# EAGLE board PCB-BI8-SE-C30RGB (EAGLE 6.4)
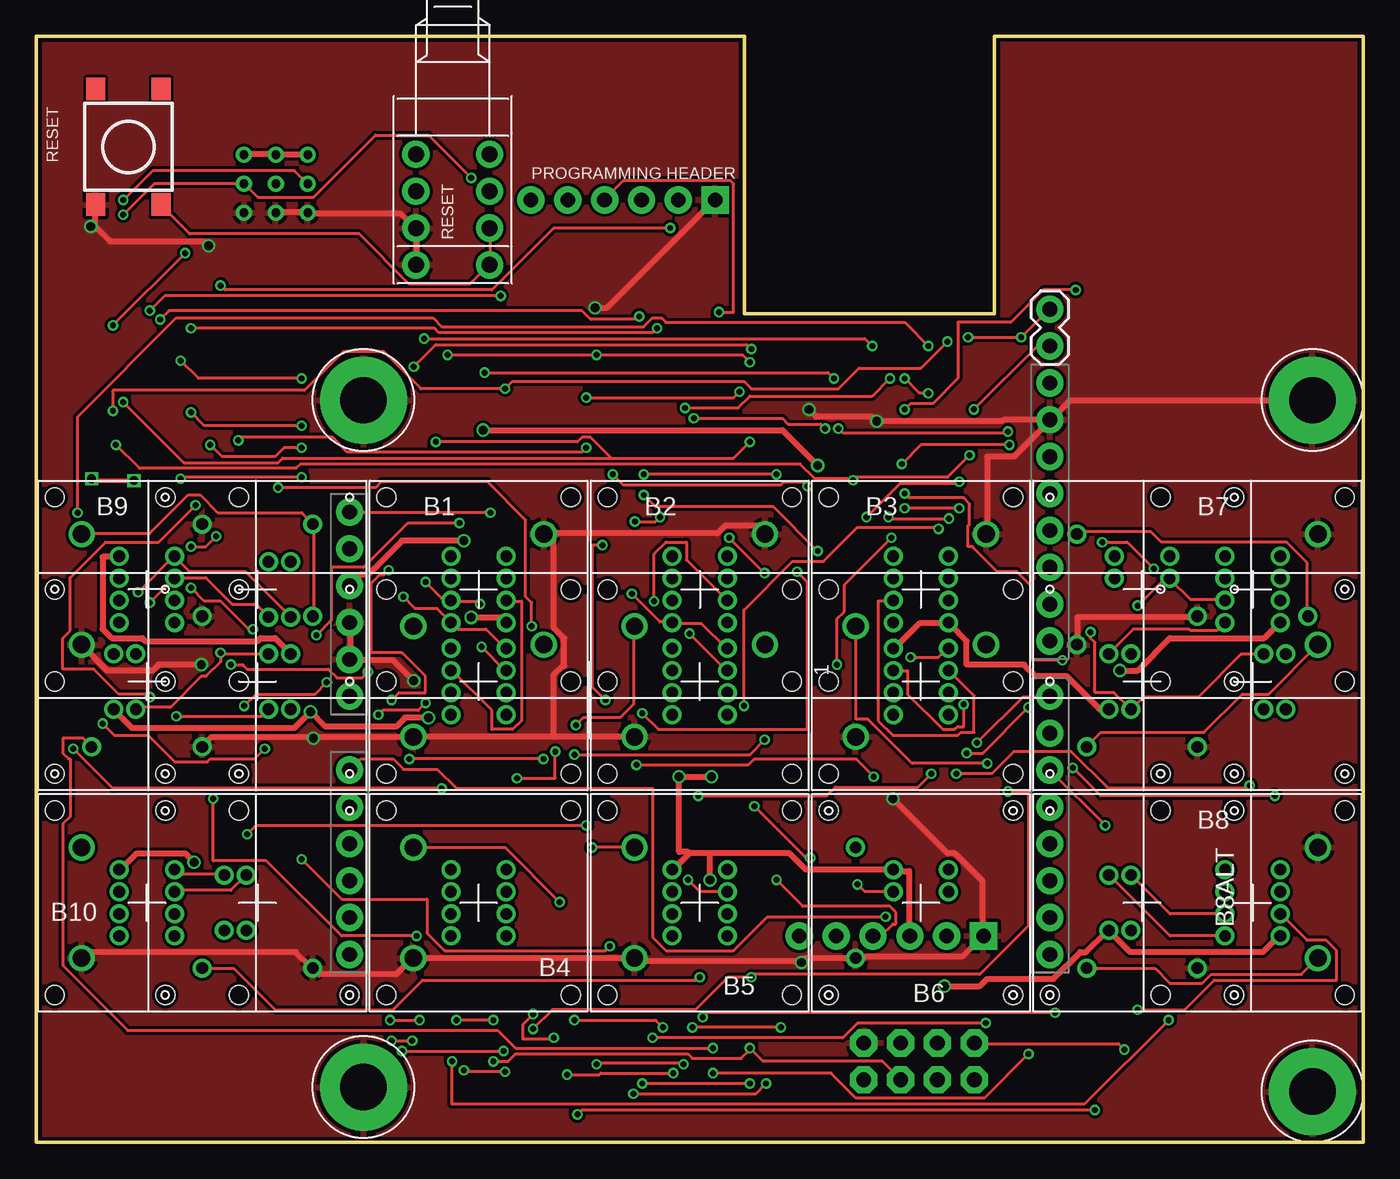
[diagram p0: board, top side]
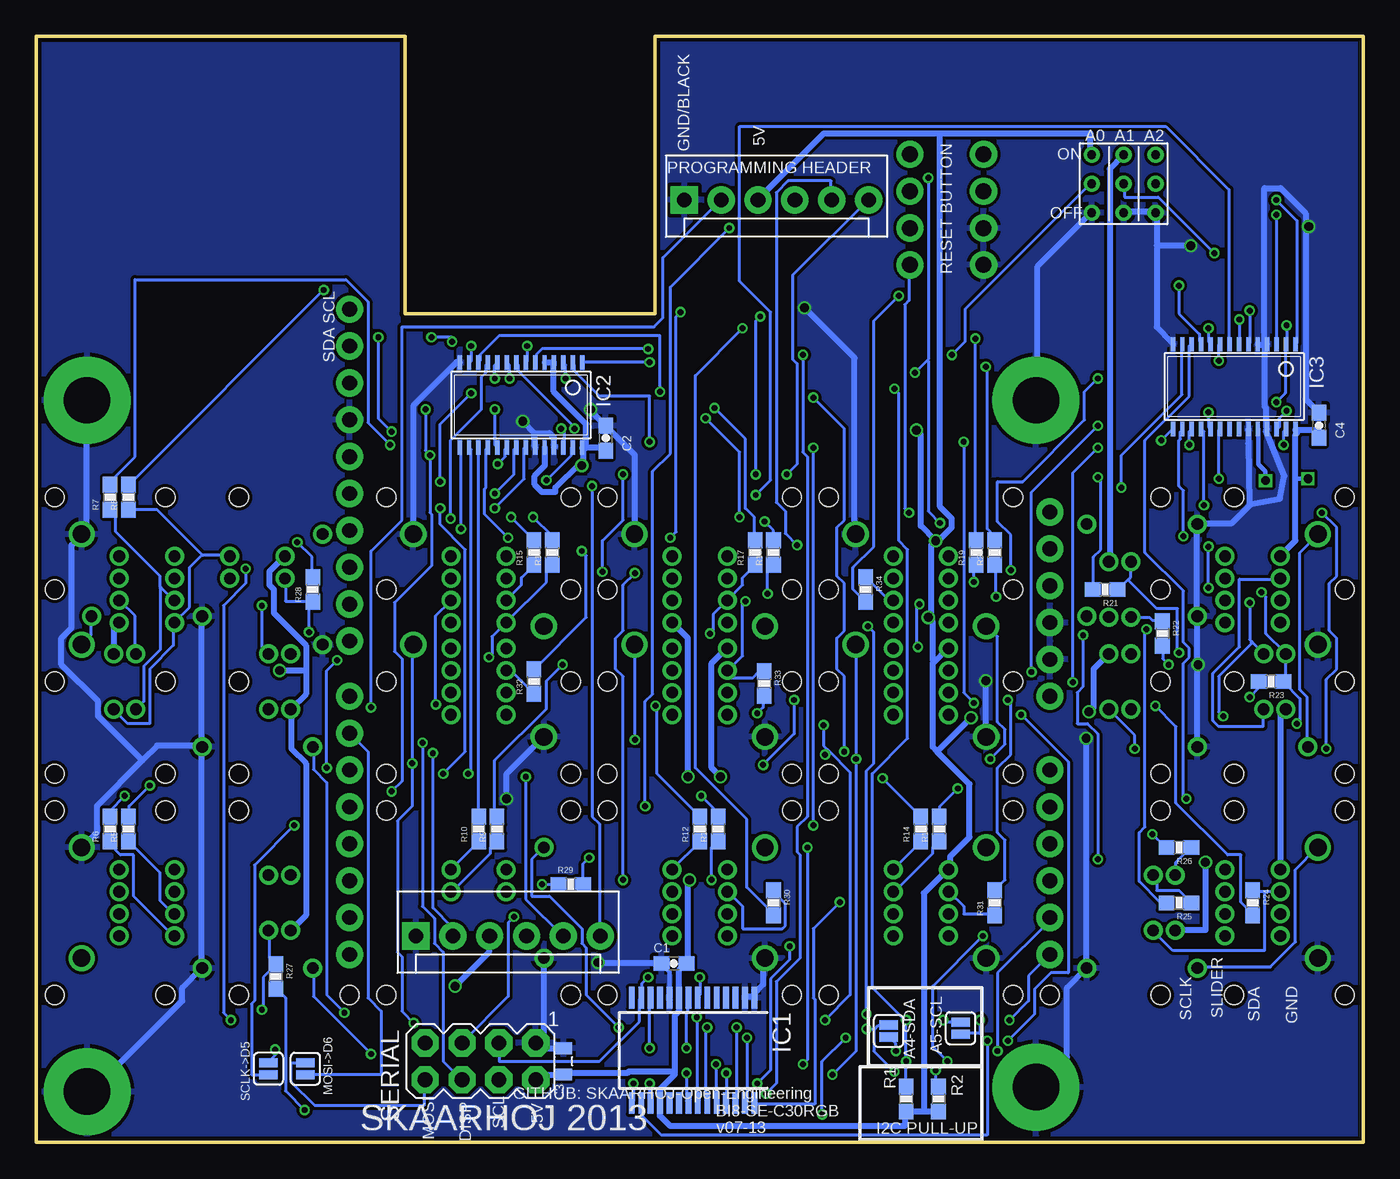
[diagram p1: board, bottom side, seen from below]

Size 91.44 x 76.2 mm. Coordinates in mm from the lower left corner, seen from the top.
Outline: 66.04,76.2 66.04,57.1 48.82,57.1 48.82,76.2 0,76.2 0,0 91.44,0 91.44,76.2 66.04,76.2
Copper layers (1*16): Top 0.035mm / dielectric 1.5mm / Bottom 0.035mm
Design rules "Fusion_eagle_rule_v1.1": minimum track width 6mil, minimum drill 12mil, track to track 6mil, track to pad 6mil, pad to pad 6mil, via to via 6mil, smd to smd 0mil, copper to edge 10mil, drill to drill 10mil, minimum pad ring 10mil, minimum via ring 6mil, stop-mask expansion 2mil, vias tented up to drill 100mil, thermal gap 10mil
Net classes: 0 default: width 0.203 mm, drill 0.406 mm, clearance 0.203 mm; 1 Power: width 0.406 mm, drill 0.61 mm, clearance 0.203 mm
Holes 1.3 mm at 90.17,38.1 82.55,44.45 82.55,31.75 90.17,25.4 82.55,25.4 77.47,25.4 82.55,22.86 82.55,10.16 69.85,10.16 67.31,10.16 67.31,22.86 54.61,10.16 54.61,22.86 8.89,44.45 1.27,38.1 1.27,25.4 8.89,25.4 13.97,25.4 8.89,22.86 8.89,31.75 13.97,38.1 21.59,10.16 8.89,10.16
tRestrict: area 48.6,56.6 to 66.3,76.2
bRestrict: area 48.6,56.6 to 66.3,76.2

## Footprints (pad centres in the part's own frame; a part is rotated, then mirrored left to right if it is on the bottom)
NKK-KP01 = drill 0.8: B(-) 1.905,-0.762; COM(+) 1.905,-2.286; G(-) -1.905,-2.286; P$3 1.905,0.762; P$4 1.905,2.286; P$7 -1.905,0.762; P$8 -1.905,2.286; R(-) -1.905,-0.762 | drill 1.2: P$1 4.496,3.81; P$1A 4.496,-3.81 | hole 1.3: -6.35,6.35; 6.35,6.35; 6.35,-6.35; -6.35,-6.35
NKK-KP01_LESSHOLES = drill 0.8: B(-) 1.905,-0.762; COM(+) 1.905,-2.286; G(-) -1.905,-2.286; P$1 4.496,3.81; P$1A 4.496,-3.81; R(-) -1.905,-0.762
0603-CAP = smd 1.1 x 1: 1 -0.85,0; 2 0.85,0
0805 = smd 0.8 x 1.2: 1 -0.9,0; 2 0.9,0
SSOP28 = smd 0.4 x 1.5: 1 -4.225,-3.625; 2 -3.575,-3.625; 3 -2.925,-3.625; 4 -2.275,-3.625; 5 -1.625,-3.625; 6 -0.975,-3.625; 7 -0.325,-3.625; 8 0.325,-3.625; 9 0.975,-3.625; 10 1.625,-3.625; 11 2.275,-3.625; 12 2.925,-3.625; 13 3.575,-3.625; 14 4.225,-3.625; 15 4.225,3.625; 16 3.575,3.625; 17 2.925,3.625; 18 2.275,3.625; 19 1.625,3.625; 20 0.975,3.625; 21 0.325,3.625; 22 -0.325,3.625; 23 -0.975,3.625; 24 -1.625,3.625; 25 -2.275,3.625; 26 -2.925,3.625; 27 -3.575,3.625; 28 -4.225,3.625
TSSOP28 = smd 0.305 x 0.991: 1 -4.225,-2.918; 2 -3.575,-2.918; 3 -2.925,-2.918; 4 -2.275,-2.918; 5 -1.625,-2.918; 6 -0.975,-2.918; 7 -0.325,-2.918; 8 0.325,-2.918; 9 0.975,-2.918; 10 1.625,-2.918; 11 2.275,-2.918; 12 2.925,-2.918; 13 3.575,-2.918; 14 4.225,-2.918; 15 4.225,2.918; 16 3.575,2.918; 17 2.925,2.918; 18 2.275,2.918; 19 1.625,2.918; 20 0.975,2.918; 21 0.325,2.918; 22 -0.325,2.918; 23 -0.975,2.918; 24 -1.625,2.918; 25 -2.275,2.918; 26 -2.925,2.918; 27 -3.575,2.918; 28 -4.225,2.918
MOLEX-1X6 = drill 1.016 pad 1.88 square: 1 0,0 | drill 1.016 pad 1.88: 2 2.54,0; 3 5.08,0; 4 7.62,0; 5 10.16,0; 6 12.7,0
1X02 = drill 1.016 pad 1.88: 1 0,0; 2 2.54,0
SJ_2S = smd 0.635 x 1.27: 1 -0.412,0; 2 0.412,0
0603-RES = smd 1.1 x 1: 1 -0.85,0; 2 0.85,0
PUSHBUTTON = drill 1.1 pad 1.88: 1 2.54,2.54; 2 2.54,-2.54; 3 -2.54,2.54; 4 -2.54,-2.54
TACTILE_SWITCH_TALL = smd 1.55 x 1.3: A1 -3.975,-2.25; A2 3.975,-2.25; B1 -3.975,2.25; B2 3.975,2.25
2X4 = drill 1.016 pad 1.88 octagon: 1 -3.81,-1.27; 2 -3.81,1.27; 3 -1.27,-1.27; 4 -1.27,1.27; 5 1.27,-1.27; 6 1.27,1.27; 7 3.81,-1.27; 8 3.81,1.27
DUEMILANOVE_VIAS = drill 1.016 pad 1.88: 3.3V 50.8,13.97; 5V 50.8,16.51; A0 50.8,29.21; A1 50.8,31.75; A2 50.8,34.29; A3 50.8,36.83; A4 50.8,39.37; A5 50.8,41.91; AREF 2.54,2.54; D2 2.54,36.83; D3 2.54,34.29; D4 2.54,31.75; D5 2.54,29.21; D6 2.54,26.67; D7 2.54,24.13; D8 2.54,20.32; D9 2.54,17.78; D10 2.54,15.24; D11 2.54,12.7; D12 2.54,10.16; D13 2.54,7.62; GND@0 50.8,19.05; GND@1 50.8,21.59; GND@2 2.54,5.08; RES 50.8,11.43; RX 2.54,41.91; TX 2.54,39.37; VIN 50.8,24.13
3BITADDR = drill 0.6: A0 -2.2,0; A1 0,0; A2 2.2,0; H1 -2.2,2; H2 0,2; H3 2.2,2; L1 -2.2,-2; L2 0,-2; L3 2.2,-2
3.2MMPAD6MM = drill 3.2 pad 6: P$1 0,0

## Placement (x,y rotation side)
B1  KP01-RGB  [NKK-KP01]  30.48,38.1 0 top
B1ALT  KP01-RGB  [NKK-KP01]  30.48,31.75 180 top
B2  KP01-RGB  [NKK-KP01]  45.72,38.1 0 top
B2ALT  KP01-RGB  [NKK-KP01]  45.72,31.75 180 top
B3  KP01-RGB  [NKK-KP01]  60.96,38.1 0 top
B3ALT  KP01-RGB  [NKK-KP01]  60.96,31.75 180 top
B4  KP01-RGB  [NKK-KP01]  30.48,16.51 180 top
B5  KP01-RGB  [NKK-KP01]  45.72,16.51 180 top
B6  KP01-RGB  [NKK-KP01_LESSHOLES]  60.96,16.51 180 top
B7  KP01-RGB  [NKK-KP01]  83.82,38.1 0 top
B7ALT  KP01-RGB  [NKK-KP01_LESSHOLES]  83.82,31.75 90 top
B7ALT1  KP01-RGB  [NKK-KP01_LESSHOLES]  76.2,38.1 180 top
B7ALT2  KP01-RGB  [NKK-KP01_LESSHOLES]  76.2,31.75 270 top
B8  KP01-RGB  [NKK-KP01]  83.82,16.51 0 top
B8ALT  KP01-RGB  [NKK-KP01_LESSHOLES]  76.2,16.51 270 top
B9  KP01-RGB  [NKK-KP01]  7.62,38.1 180 top
B9ALT  KP01-RGB  [NKK-KP01_LESSHOLES]  7.62,31.75 270 top
B9ALT1  KP01-RGB  [NKK-KP01_LESSHOLES]  15.24,38.1 90 top
B9ALT2  KP01-RGB  [NKK-KP01_LESSHOLES]  15.24,31.75 90 top
B10  KP01-RGB  [NKK-KP01]  7.62,16.51 180 top
B10ALT  KP01-RGB  [NKK-KP01_LESSHOLES]  15.24,16.51 270 top
C1  100nF  [0603-CAP]  47.5,12.32 0 bottom
C2  100nF  [0603-CAP]  52.2,48.51 90 bottom
C3  10uF  [0805]  55.12,5.59 90 bottom
C4  100nF  [0603-CAP]  3.05,49.4 90 bottom
IC1  MCP23017SS  [SSOP28]  46.18,6.35 180 bottom
IC2  PCA9685  [TSSOP28]  58.04,50.8 180 bottom
IC3  PCA9685  [TSSOP28]  8.89,52.07 180 bottom
JP1  [MOLEX-1X6]  65.28,14.22 0 bottom
JP2  [MOLEX-1X6]  46.79,64.93 0 bottom
JP3  [1X02]  69.85,54.86 90 top
MOSI->D6  SOLDERJUMPERNC  [SJ_2S]  72.9,5.08 270 bottom
R1  1K5  [0603-RES]  31.5,2.98 270 bottom
R2  1K5  [0603-RES]  29.27,2.98 270 bottom
R5  270  [0603-RES]  85.09,21.59 90 bottom
R6  270  [0603-RES]  86.36,21.59 90 bottom
R7  270  [0603-RES]  86.36,44.45 90 bottom
R8  270  [0603-RES]  85.09,44.45 90 bottom
R9  270  [0603-RES]  59.69,21.59 90 bottom
R10  270  [0603-RES]  60.96,21.59 90 bottom
R11  270  [0603-RES]  44.45,21.59 90 bottom
R12  270  [0603-RES]  45.72,21.59 90 bottom
R13  270  [0603-RES]  29.21,21.59 90 bottom
R14  270  [0603-RES]  30.48,21.59 90 bottom
R15  270  [0603-RES]  57.15,40.64 90 bottom
R16  270  [0603-RES]  55.88,40.64 90 bottom
R17  270  [0603-RES]  41.91,40.64 90 bottom
R18  270  [0603-RES]  40.64,40.64 90 bottom
R19  270  [0603-RES]  26.67,40.64 90 bottom
R20  270  [0603-RES]  25.4,40.64 90 bottom
R21  270  [0603-RES]  17.78,38.1 180 bottom
R22  270  [0603-RES]  13.84,35.05 270 bottom
R23  270  [0603-RES]  6.35,31.75 180 bottom
R24  270  [0603-RES]  7.62,16.51 270 bottom
R25  270  [0603-RES]  12.7,16.51 180 bottom
R26  270  [0603-RES]  12.7,20.32 180 bottom
R27  270  [0603-RES]  74.93,11.43 270 bottom
R28  270  [0603-RES]  72.39,38.1 90 bottom
R29  270  [0603-RES]  54.61,17.78 0 bottom
R30  270  [0603-RES]  40.64,16.51 270 bottom
R31  270  [0603-RES]  25.4,16.51 90 bottom
R32  270  [0603-RES]  57.15,31.75 90 bottom
R33  270  [0603-RES]  41.27,31.62 270 bottom
R34  270  [0603-RES]  34.29,38.1 270 bottom
S1  [PUSHBUTTON]  28.7,62.99 180 top
S2  [PUSHBUTTON]  28.7,65.53 180 top
S3->A2  SOLDERJUMPERNC  [SJ_2S]  27.75,7.87 270 bottom
S3->A3  SOLDERJUMPERNC  [SJ_2S]  32.7,7.68 270 bottom
S4  SWITCH-MOMENTARY-2  [TACTILE_SWITCH_TALL]  6.35,68.58 270 top
SCLK->D5  SOLDERJUMPERNC  [SJ_2S]  75.44,5.08 90 bottom
SERIAL  M04X2  [2X4]  60.83,5.59 180 bottom
U1  ARDUINO_SHIELDNO_SILK  [DUEMILANOVE_VIAS]  72.39,54.86 180 top
U$24  3BITADDR  [3BITADDR]  16.51,66.04 0 bottom
U$25  GNDPAD6MM  [3.2MMPAD6MM]  22.55,3.81 0 top
U$26  GNDPAD6MM  [3.2MMPAD6MM]  87.94,3.5 0 top
U$27  GNDPAD6MM  [3.2MMPAD6MM]  87.94,51.13 0 top
U$28  GNDPAD6MM  [3.2MMPAD6MM]  22.55,51.13 0 top

## Library data of the parts
B1 B1ALT B2 B2ALT B3 B3ALT B4-B7 B7ALT B7ALT1 B7ALT2 B8 B8ALT B9 B9ALT B9ALT1 B9ALT2 B10 B10ALT S1 S2 U$24-U$28 = SKAARHOJ
C1-C4 JP1-JP3 MOSI->D6 R1 R2 R5-R34 S3->A2 S3->A3 S4 SCLK->D5 SERIAL U1 = SparkFun
IC1 = microchip; MF: MICROCHIP; MPN: MCP23017-E/SS; OC_FARNELL: 1467674; OC_NEWARK: 31K2960
IC2 IC3 = wsmith

## Nets
5V [Power]: B1.COM(+) B1ALT.COM(+) B2.COM(+) B2ALT.COM(+) B3.COM(+) B3ALT.COM(+) B4.COM(+) B5.COM(+) B6.COM(+) B7.COM(+) B7ALT1.COM(+) B7ALT2.COM(+) B7ALT.COM(+) B8.COM(+) B8ALT.COM(+) B9.COM(+) B9ALT1.COM(+) B9ALT2.COM(+) B9ALT.COM(+) B10.COM(+) B10ALT.COM(+) C1.2 C2.1 C3.1 C4.1 IC1.9 IC1.18 IC2.4 IC2.5 IC2.24 IC2.28 IC3.24 IC3.28 JP1.3 JP2.3 R1.2 R2.2 SERIAL.2 U1.5V U$24.H1 U$24.H2 U$24.H3
A0: IC1.15 IC2.1 IC3.1 U$24.A0
A1: IC1.16 IC2.2 IC3.2 U$24.A1
A2: IC1.17 IC2.3 IC3.3 U$24.A2
ANALOG4: S3->A3.2 U1.A4
ANALOG5: S3->A2.2 U1.A5
D2: U1.D2
D3: U1.D3
D5: SCLK->D5.1 U1.D5
D6: MOSI->D6.2 U1.D6
D7: SERIAL.6 U1.D7
D8: U1.D8
D9: U1.D9
GND [Power]: B1.P$1 B1ALT.P$1 B2.P$1 B2ALT.P$1 B3.P$1 B3ALT.P$1 B4.P$1 B5.P$1 B6.P$1 B7.P$1 B7ALT1.P$1 B7ALT2.P$1 B7ALT.P$1 B8.P$1 B8ALT.P$1 B9.P$1 B9ALT1.P$1 B9ALT2.P$1 B9ALT.P$1 B10.P$1 B10ALT.P$1 C1.1 C2.2 C3.2 C4.2 IC1.1 IC1.2 IC1.10 IC2.14 IC2.23 IC2.25 IC3.4 IC3.5 IC3.14 IC3.23 IC3.25 JP1.1 JP2.1 S1.1 S2.1 S4.A2 SERIAL.1 U1.GND@0 U1.GND@1 U1.GND@2 U$24.L1 U$24.L2 U$24.L3 U$25.P$1 U$26.P$1 U$27.P$1 U$28.P$1
GPA0: B8.P$1A B8ALT.P$1A IC1.21
GPA1: B7.P$1A B7ALT1.P$1A B7ALT2.P$1A B7ALT.P$1A IC1.22
GPA2: B6.P$1A IC1.23
GPA3: B5.P$1A IC1.24
GPA4: B1.P$1A B1ALT.P$1A IC1.25
GPA5: B2.P$1A B2ALT.P$1A IC1.26
GPA6: B3.P$1A B3ALT.P$1A IC1.27
GPA7: B4.P$1A IC1.28
GPA8: B9.P$1A B9ALT1.P$1A B9ALT2.P$1A B9ALT.P$1A IC1.8
GPA9: B10.P$1A B10ALT.P$1A IC1.7
I2C_SCL: IC1.12 IC2.26 IC3.26 JP3.2 R1.1 S3->A2.1 SERIAL.4
I2C_SDA: IC1.13 IC2.27 IC3.27 JP3.1 R2.1 S3->A3.1 SERIAL.3
L0: B1.G(-) B1ALT.G(-) R20.1
L0B: B1.B(-) B1ALT.B(-) R34.1
L1: B1.R(-) B1ALT.R(-) R19.1
L1B: B2.B(-) B2ALT.B(-) R33.1
L2: B2.G(-) B2ALT.G(-) R18.1
L2B: B3.B(-) B3ALT.B(-) R32.1
L3: B2.R(-) B2ALT.R(-) R17.1
L3B: B4.B(-) R31.1
L4: B3.G(-) B3ALT.G(-) R16.1
L4B: B5.B(-) R30.1
L5: B3.R(-) B3ALT.R(-) R15.1
L5B: B6.B(-) R29.1
L6: B4.G(-) R14.1
L6B: B7.B(-) B7ALT1.B(-) B7ALT2.B(-) B7ALT.B(-) R28.1
L7: B4.R(-) R13.1
L7B: B8.B(-) B8ALT.B(-) R27.1
L8: B5.G(-) R12.1
L8G: B10.G(-) B10ALT.G(-) R26.1
L9: B5.R(-) R11.1
L9R: B10.R(-) B10ALT.R(-) R25.1
L10: B6.G(-) R10.1
L10B: B10.B(-) B10ALT.B(-) R24.1
L11: B6.R(-) R9.1
L11G: B9.G(-) B9ALT1.G(-) B9ALT2.G(-) B9ALT.G(-) R23.1
L12: B7.G(-) B7ALT1.G(-) B7ALT2.G(-) B7ALT.G(-) R8.1
L12R: B9.R(-) B9ALT1.R(-) B9ALT2.R(-) B9ALT.R(-) R22.1
L13: B7.R(-) B7ALT1.R(-) B7ALT2.R(-) B7ALT.R(-) R7.1
L13B: B9.B(-) B9ALT1.B(-) B9ALT2.B(-) B9ALT.B(-) R21.1
L14: B8.G(-) B8ALT.G(-) R6.1
L15: B8.R(-) B8ALT.R(-) R5.1
MOSI: MOSI->D6.1 SERIAL.8
N$1: JP1.2 JP2.2
N$2: IC3.13 R27.2
N$3: IC3.12 R28.2
N$4: IC2.13 R13.2
N$5: IC2.12 R14.2
N$6: IC3.11 R29.2
N$7: IC2.11 R15.2
N$9: IC2.10 R16.2
N$10: IC2.9 R17.2
N$11: IC2.8 R18.2
N$12: IC2.7 R19.2
N$13: IC3.10 R30.2
N$14: IC3.9 R31.2
N$15: IC3.8 R32.2
N$16: IC3.7 R33.2
N$17: IC3.6 R34.2
N$18: IC3.15 R26.2
N$19: IC2.6 R20.2
N$20: IC2.15 R12.2
N$21: IC2.16 R11.2
N$22: IC2.17 R10.2
N$23: IC2.18 R9.2
N$24: IC2.19 R8.2
N$25: IC2.20 R7.2
N$26: IC2.21 R6.2
N$27: IC2.22 R5.2
N$28: IC3.16 R25.2
N$29: IC3.17 R24.2
N$30: IC3.18 R23.2
N$31: IC3.19 R22.2
N$32: IC3.20 R21.2
N$33: JP1.4 JP2.4
N$34: JP1.5 JP2.5
N$45: JP1.6 JP2.6
RESET: S1.3 S2.3 S4.B2 U1.RES
SCLK: SCLK->D5.2 SERIAL.7
SLIDER_IN: SERIAL.5 U1.A0
VIN [Power]: U1.VIN

## Tracks (layer width: path | path; a pad name or v marks a point on that pad's centre or on a via)
5V  (via drill 0.6, 0.61)
  Top 0.305: v6.73,45.59 3.94,45.59 v3.81,45.72
  Top 0.406: U$24.H3 14.33,68.07 16.46,68.07 U$24.H2 16.66,68.07 18.69,68.07 U$24.H1 | B8.COM(+) 85.65,14.22 84.53,13.11 75.39,13.11 73.97,14.53 B8ALT.COM(+) 73.76,14.53 72.34,13.11 71.93,13.11 70.1,11.28 65.53,11.28 65.02,10.77 v62.59,10.77 | B3ALT.COM(+) 59.13,34.04 60.86,35.76 62.79,35.76 B3.COM(+) 62.99,35.66 64.11,34.54 64.11,32.92 68.07,32.92 68.89,32.11 71.02,32.11 73.25,29.87 73.86,29.87 B7ALT2.COM(+) | v74.68,32.51 75.89,32.51 78.13,34.75 84.63,34.75 85.65,35.76 B7.COM(+) | v10.87,19.3 10.26,19.91 6.91,19.91 5.79,18.8 B10.COM(+) | B9ALT2.COM(+) 17.48,33.73 16.46,34.75 15.44,34.75 15.24,34.54 7.52,34.54 7.32,34.75 5.18,34.75 4.57,35.36 4.57,40.34 5.69,40.34 B9.COM(+) | B9ALT.COM(+) 5.38,29.77 6.6,28.55 17.78,28.55 v18.9,29.67 19.91,28.65 24.79,28.65 25.4,29.26 v27.03,29.26 | 45.01,19.91 43.89,18.8 B5.COM(+) | 46.43,19.91 51.92,19.91 53.03,18.8 B6.COM(+) 59.23,18.69 60.15,18.69 60.15,14.22 JP1.3 | 46.43,19.91 45.01,19.91 | 45.01,19.91 44.91,20.02 44.3,20.02 v44.3,25.2 v46.53,25.2 | v29.97,36.17 32,36.17 32.31,35.87 B1.COM(+) | U1.5V 22.35,39.12 22.86,39.12 25.2,41.45 v29.46,41.45 | v53.85,46.63 51.41,49.07 v30.79,49.07 | v46.43,18.09 46.43,19.91
  Bottom 0.305: IC3.24 7.24,49.15 7.24,46.74 6.73,46.23 v6.73,45.59 | v3.81,45.72 4.67,45.72
  Bottom 0.406: B9ALT1.COM(+) 17.48,40.03 17.48,67.06 16.56,67.97 U$24.H2 | 29.16,69.49 18.8,69.49 18.8,68.07 U$24.H1 | 29.16,69.49 37.19,69.49 41.66,65.02 JP2.3 | B7.COM(+) 85.75,35.76 86.06,35.46 86.06,33.73 B7ALT.COM(+) | 72.85,32.51 72.85,34.24 75.08,36.47 75.08,38.1 75.39,38.41 75.39,39.32 74.37,40.34 B7ALT1.COM(+) | 72.85,32.51 72.85,30.89 73.86,29.87 B7ALT2.COM(+) 73.86,29.67 73.86,27.13 72.85,26.11 72.85,15.65 73.86,14.63 B8ALT.COM(+) | 72.85,32.51 v74.68,32.51 | B9ALT.COM(+) 5.38,29.77 5.69,29.46 5.69,18.8 B10.COM(+) | v10.87,19.3 10.87,14.63 12.9,14.63 B10ALT.COM(+) | C4.1 3.05,49.07 4.57,49.07 IC3.28 4.57,48.87 4.67,48.77 4.67,45.72 4.67,41.45 5.69,40.44 B9.COM(+) | v18.9,29.67 18.59,29.97 18.59,32.61 17.58,33.63 B9ALT2.COM(+) | v44.3,25.2 44.91,25.81 44.91,33.02 43.89,34.04 B2ALT.COM(+) | v46.53,25.2 46.53,34.75 47.55,35.76 B2.COM(+) | SERIAL.2 57,4.37 57,4.67 55.17,4.67 C3.1 54.97,4.78 50.7,4.78 50.6,4.88 47.45,4.88 | 47.45,4.88 47.45,8.74 47.14,9.04 47.14,9.86 IC1.9 47.14,10.06 47.14,11.89 46.74,12.29 C1.2 46.53,12.39 46.53,17.98 v46.43,18.09 | 47.45,4.88 47.45,4.67 48.46,3.66 48.46,2.74 IC1.18 48.46,2.54 48.46,1.83 47.75,1.12 31.6,1.12 31.6,2.03 R1.2 30.28,2.13 | IC2.5 56.39,53.75 55.78,53.75 IC2.4 55.78,53.54 55.78,51.71 53.54,49.48 53.54,47.85 | 53.54,47.85 52.22,47.85 52.22,47.75 C2.1 | 53.54,47.85 53.75,47.85 IC2.28 53.75,47.65 53.75,47.04 54.05,46.74 | 54.05,46.74 55.68,45.11 55.68,44.81 56.59,44.81 57.1,45.31 57.1,45.92 56.39,46.63 56.39,47.85 IC2.24 | 30.28,2.13 29.36,2.13 R2.2 | 30.28,2.13 30.28,17.17 28.65,18.8 B4.COM(+) 28.45,18.9 28.45,19.71 27.13,21.03 27.13,24.69 29.36,26.92
  Bottom 0.406: 29.57,33.12 29.67,33.02 29.67,27.23 29.36,26.92 | 29.57,33.12 28.65,34.04 B1ALT.COM(+) | 29.57,33.12 29.67,33.22 29.67,35.87 v29.97,36.17 29.77,36.17 29.77,41.15 v29.46,41.45 | v53.85,46.63 53.95,46.63 54.05,46.74 | v30.79,49.07 30.48,48.77 30.48,42.47 v29.46,41.45 | 29.36,26.92 v27.03,29.26 | v62.59,10.77 60.25,13.11 60.25,14.22 JP1.3 | 29.16,69.49 29.16,43.79 28.35,42.98 28.35,42.37 29.36,41.35 v29.46,41.45
A0  (via drill 0.41)
  Top 0.203: v5.99,64.92 8.03,66.95 17.78,66.95 18.69,66.04 U$24.A0 | v49.17,53.75 48.67,54.25 v38.61,54.25 v28.35,54.25 | v50.29,4.06 49.58,3.35 v41.15,3.35
  Bottom 0.203: v5.99,64.92 4.57,63.5 4.57,55.07 IC3.1 | v49.17,53.75 53.75,53.75 IC2.1 | v28.35,54.25 27.43,55.17 27.43,57.4 18.8,66.04 U$24.A0 | v50.29,4.06 50.29,2.85 50.39,2.74 IC1.15 | v41.15,3.35 40.44,4.06 40.44,11.07 38.81,12.7 38.81,19.81 39.01,20.02 39.01,21.74 38.3,22.45 38.3,47.24 38.61,47.55 v38.61,54.25
A1  (via drill 0.41)
  Top 0.203: v10.26,61.27 v5.28,56.29 | v49.17,48.26 48.06,47.14 39.62,47.14 | 39.62,47.14 16.97,47.14 16.66,46.84 10.16,46.84 v5.99,51 | v24.49,7.01 v25.91,7.01 | v23.57,29.46 23.88,29.77 26.31,29.77 v26.82,30.28 | v27.53,48.26 37.29,48.26 37.59,48.56 38.2,48.56 39.62,47.14
  Bottom 0.203: v5.28,56.29 5.28,55.07 IC3.2 5.38,54.97 5.38,51.61 v5.99,51 | v10.26,61.27 14.12,65.13 16.46,65.13 16.46,66.04 U$24.A1 | v49.17,48.26 49.17,51.41 52.63,51.41 54.36,53.14 54.36,53.54 54.46,53.65 IC2.2 | v25.91,7.01 25.91,0.51 48.36,0.51 49.68,1.83 49.68,2.64 IC1.16 | v24.49,7.01 22.66,8.84 22.66,10.57 21.54,11.68 20.32,11.68 20.32,26.21 v23.57,29.46 | v26.82,30.28 27.53,30.99 v27.53,48.26
A2  (via drill 0.41)
  Top 0.203: v5.99,63.91 8.13,66.04 U$24.A2 14.33,66.04 15.24,65.13 19.1,65.13 23.37,69.39 27.03,69.39 v29.97,66.45 | v54.97,52.63 54.56,53.03 v30.89,53.03 | v41.76,4.06 v49.17,4.06 | v39.52,13.51 39.22,13.21 28.14,13.21 26.92,14.43 26.92,16.76 21.03,16.76 v18.29,19.51 | v19.3,34.95 20.32,35.97 20.32,39.62 22.55,39.62 25.6,42.67 v29.16,42.67
  Bottom 0.203: v5.99,63.91 5.99,55.07 IC3.3 | v54.97,52.63 54.97,53.54 55.07,53.65 IC2.3 | 30.02,53.9 29.97,53.95 v29.97,66.45 | 30.02,53.9 v30.89,53.03 | v49.17,4.06 49.17,2.74 IC1.17 | v41.76,4.06 40.84,4.98 40.84,11.28 39.52,12.6 v39.52,13.51 | v18.29,19.51 18.29,28.14 19,28.85 19.71,28.85 19.71,30.99 19.3,31.39 v19.3,34.95 | v29.16,42.67 29.97,43.48 29.97,53.85 30.02,53.9
ANALOG4  (via drill 0.41)
  Top 0.203: v25.2,6.3 v32.21,6.3
  Bottom 0.203: v32.21,6.3 32.21,6.81 32.61,7.21 S3->A3.2 | v25.2,6.3 25.2,11.68 21.64,15.24 21.64,15.44 U1.A4
ANALOG5  (via drill 0.41)
  Top 0.203: v24.38,8.43 v26.42,8.43
  Bottom 0.203: v26.42,8.43 26.42,7.52 27.74,7.52 S3->A2.2 | v24.38,8.43 23.06,9.75 23.06,11.48 U1.A5
D5  (via drill 0.41)
  Top 0.203: U1.D5 v73.66,21.84
  Bottom 0.203: v73.66,21.84 76.4,19.1 76.4,9.75 76.61,9.55 76.61,4.67 75.49,4.67 SCLK->D5.1
D6
  Bottom 0.203: U1.D6 68.58,26.92 68.58,9.96 67.67,9.04 67.67,4.67 72.85,4.67 MOSI->D6.2
D7  (via drill 0.41)
  Top 0.203: v64.82,27.53 67.97,30.68 69.8,30.68 U1.D7
  Bottom 0.203: v64.82,27.53 64.82,16.26 64.01,15.44 64.01,13.72 63.4,13.11 63.4,5.59 62.18,4.37 SERIAL.6
GND  (via drill 0.61)
  Top 0.406: B10.P$1 3.15,12.7 3.56,13.11 17.88,13.11 18.9,12.09 B10ALT.P$1 19.1,11.99 19.51,11.58 24.79,11.58 25.91,12.7 B4.P$1 B5.P$1 41.25,12.7 41.45,12.5 52.63,12.5 v52.73,12.39 53.03,12.7 B6.P$1 56.59,12.8 63.8,12.8 65.13,14.12 JP1.1 65.23,14.22 65.23,17.98 63.3,19.91 62.79,19.91 v59.03,23.67 | B2.P$1 50.19,41.96 49.68,42.47 47.45,42.47 46.94,41.96 35.05,41.96 B1.P$1 35.66,41.86 35.66,35.46 36.37,34.75 36.37,32.82 36.27,32.82 35.66,32.21 35.66,27.94 | v38.51,57.51 39.32,57.51 46.74,64.92 JP2.1 | S1.1 26.21,60.45 26.21,62.99 S2.1 26.01,63.09 25.09,64.01 18.9,64.01 U$24.L1 18.69,64.11 16.56,64.11 U$24.L2 | U1.GND@0 21.64,35.76 21.64,33.33 U1.GND@1 21.74,33.22 24.59,33.22 v26.01,31.8 | B2ALT.P$1 35.66,27.94 | 35.66,27.94 B1ALT.P$1 19.1,27.94 | S4.A2 4.06,64.52 4.06,63.09 v3.76,63.09 4.17,62.99 5.08,62.08 11.58,62.08 v11.89,61.77 | v11.38,32.92 8.43,32.92 8.03,32.51 4.88,32.51 3.15,34.24 B9.P$1 | 19.1,27.94 12.09,27.94 11.48,27.33 B9ALT.P$1 | U1.GND@2 66.65,49.78 66.55,49.68 v57.91,49.68 57.61,49.99 53.75,49.99 v53.24,50.49 | B3.P$1 65.53,41.96 65.53,47.24 67.36,47.24 69.8,49.68 U1.GND@2 | U1.GND@2 70,49.89 71.22,51.1 87.88,51.1 U$27.P$1 | B7ALT1.P$1 71.73,34.34 71.73,36.17 79.96,36.17 B7ALT.P$1 | v19.1,27.84 19.1,27.94
  Bottom 0.305: IC1.10 47.8,11.77 C1.1
  Bottom 0.406: U$25.P$1 22.45,3.86 20.42,5.89 20.42,10.67 19.1,11.99 B10ALT.P$1 19.1,12.19 v19.1,27.84 | IC1.2 42.57,10.06 41.96,10.06 IC1.1 41.96,10.26 41.35,10.87 41.35,12.6 41.25,12.7 B5.P$1 | C3.2 55.17,6.5 57,6.5 57,6.81 SERIAL.1 56.9,7.01 56.49,7.42 56.49,12.7 B6.P$1 | v52.73,12.39 48.36,12.39 C1.1 | v59.03,23.67 59.03,25.4 56.49,27.94 B3ALT.P$1 | B2.P$1 50.19,41.96 50.19,47.35 52.12,49.28 C2.2 52.32,49.48 53.24,50.39 v53.24,50.49 | v38.51,57.51 35.05,54.05 35.05,41.96 B1.P$1 | 13.11,54.97 IC3.14 13.21,55.17 14.22,56.19 14.22,61.77 | 14.22,61.77 14.22,64.01 U$24.L3 14.43,64.11 16.46,64.11 U$24.L2 | U$24.L1 18.8,64.01 22.45,60.35 22.45,51.21 U$28.P$1 | v26.01,31.8 26.01,27.94 B1ALT.P$1 | 7.85,43.97 7.92,48.16 7.92,49.07 IC3.23 | 7.85,43.97 5.74,44.35 5.44,45.92 6.71,49.07 IC3.25 6.71,49.28 6.71,50.6 6.81,50.7 6.81,54.97 | 6.81,54.97 7.21,54.97 IC3.5 | 6.81,54.97 6.71,54.97 IC3.4 | 3.96,63.09 3.96,64.01 5.69,65.73 6.81,65.73 6.81,54.97 | 3.96,63.09 3.96,51.21 3.05,50.29 C4.2 | v3.76,63.09 3.96,63.09 | 11.48,32.92 11.48,36.17 B9ALT2.P$1 11.48,36.37 11.48,42.57 B9ALT1.P$1 11.28,42.67 9.04,42.67 7.72,43.99 7.85,43.97 | 11.48,32.92 11.48,27.33 B9ALT.P$1 | v11.38,32.92 11.48,32.92 | v11.89,61.77 14.22,61.77 | IC2.14 62.28,53.75 62.48,53.75 65.43,50.8 65.43,41.96 B3.P$1 | 57.1,48.87 56.08,48.87 55.78,48.56 55.78,48.06 55.68,47.95 IC2.25 | 57.1,48.87 57.1,47.95 IC2.23 | v57.91,49.68 57.1,48.87 | U$27.P$1 87.99,51.1 87.99,42.27 88.29,41.96 B7.P$1 88.39,41.76 89,41.15 89,35.46 89.71,34.75 89.71,32.92 87.17,30.38 87.17,29.36 84.12,26.31 | U$26.P$1 87.88,3.56 87.58,3.56 81.38,9.75 81.38,10.67 80.06,11.99 B8ALT.P$1 80.06,12.19 80.06,27.13 B7ALT2.P$1
  Bottom 0.406: B7ALT2.P$1 80.06,27.33 80.06,36.17 B7ALT.P$1 | 84.12,26.31 83.11,27.33 80.26,27.33 B7ALT2.P$1 | 84.12,26.31 87.27,23.16 87.27,21.34 88.29,20.32 B8.P$1
  pour Top: 0,0 91.44,0 91.44,76.2 0,76.2
  pour Bottom: 0,0 91.44,0 91.44,76.2 0,76.2
GPA0  (via drill 0.41)
  Top 0.203: v46.63,4.78 54.76,4.78 56.49,3.05 65.33,3.05 v68.38,6.1 | B8.P$1A 88.29,12.7 87.17,11.58 80.97,11.58 80.37,10.97 78.13,10.97 77.11,11.99 72.44,11.99 B8ALT.P$1A
  Bottom 0.203: v46.63,4.78 46.63,2.85 46.53,2.74 IC1.21 | v68.38,6.1 72.34,10.06 72.34,11.99 B8ALT.P$1A
GPA1  (via drill 0.41)
  Top 0.203: B7ALT1.P$1A 71.73,41.96 71.83,42.06 76.81,42.06 77.52,41.35 86.16,41.35 87.58,39.93 87.58,36.27 B7ALT.P$1A | v45.92,8.64 46.23,8.94 v70.21,8.94 | B7.P$1A 88.29,34.24 84.94,30.89 83.11,30.89 80.47,28.25 73.36,28.25 72.44,27.33 B7ALT2.P$1A
  Bottom 0.203: B7.P$1A 88.29,34.34 87.68,34.95 87.68,36.17 B7ALT.P$1A | v45.92,8.64 45.92,2.74 IC1.22 | v70.21,8.94 71.42,10.16 71.42,24.79 72.34,25.7 72.34,27.23 B7ALT2.P$1A
GPA2  (via drill 0.41)
  Top 0.203: v51.31,7.92 v45.21,7.92
  Bottom 0.203: v45.21,7.92 45.31,7.82 45.31,2.85 45.21,2.74 IC1.23 | v51.31,7.92 53.54,10.16 53.54,13.41 53.85,13.72 53.85,14.73 56.08,16.97 57.3,16.97 57.3,19.51 56.49,20.32 B6.P$1A
GPA3  (via drill 0.41)
  Top 0.203: v44.6,5.38 44.5,5.49 38.71,5.49 v38.61,5.38 | B5.P$1A v38.3,20.32
  Bottom 0.203: v44.6,5.38 44.6,2.74 IC1.24 | v38.61,5.38 38.3,5.69 v38.3,20.32
GPA4  (via drill 0.41)
  Top 0.203: v43.89,4.78 38.91,4.78 38.81,4.67 v36.58,4.67 | v34.95,26.42 v25.7,26.42
  Bottom 0.203: v43.89,4.78 43.89,2.74 IC1.25 | v36.58,4.67 34.95,6.3 v34.95,26.42 34.95,34.24 B1.P$1A | v25.7,26.42 24.69,27.43 24.69,28.45 25.2,28.96 25.2,34.85 25.91,35.56 B1ALT.P$1A
GPA5  (via drill 0.41)
  Top 0.203: v43.18,7.92 42.67,8.43 v37.08,8.43 | v37.19,28.75 37.69,29.26 40.23,29.26 41.15,30.18 41.15,35.56 B2ALT.P$1A | v50.19,27.74 49.17,26.72 v37.08,26.72
  Bottom 0.203: v43.18,7.92 43.18,2.74 IC1.26 | v37.08,8.43 35.36,10.16 35.36,25.5 36.83,26.98 | 36.83,26.98 37.19,27.33 v37.19,28.75 | v50.19,27.74 50.19,34.24 B2.P$1A | 36.83,26.98 v37.08,26.72
GPA6  (via drill 0.41)
  Top 0.203: v42.47,7.21 55.58,7.21 56.59,8.23 v65.43,8.23 | v65.53,26.11 60.35,26.11 57.3,29.16 56.49,29.16 56.49,35.56 B3ALT.P$1A
  Bottom 0.203: v42.47,7.21 42.47,2.85 42.57,2.74 IC1.27 | v65.43,8.23 66.24,9.04 66.24,12.8 66.55,13.11 66.55,22.15 65.53,23.16 v65.53,26.11 65.53,34.24 B3.P$1A
GPA7  (via drill 0.41)
  Top 0.203: v36.07,16.56 32.31,20.32 B4.P$1A
  Bottom 0.203: v36.07,16.56 37.9,14.73 37.9,9.96 37.8,9.86 37.8,2.64 41.86,2.64 IC1.28
GPA8  (via drill 0.41)
  Top 0.203: B9ALT2.P$1A 19.1,36.27 19.1,42.57 B9ALT1.P$1A 19,42.67 18.29,43.38 12.5,43.38 11.28,44.6 10.46,44.6 7.82,41.96 3.15,41.96 B9.P$1A | v46.63,6.5 33.02,6.5 31.8,7.72 6.3,7.72 1.83,12.19 1.83,21.95 2.34,22.45 2.34,26.42 2.23,26.42 1.83,26.82 1.83,27.84 3.25,27.84 3.76,27.33 B9ALT.P$1A
  Bottom 0.203: v46.63,6.5 46.63,8.94 46.53,9.04 46.53,9.96 IC1.8 | B9.P$1A 3.15,41.86 4.37,40.64 4.37,31.19 3.86,30.68 3.86,27.33 B9ALT.P$1A
GPA9  (via drill 0.41)
  Top 0.203: v45.72,11.38 45.52,11.18 26.62,11.18 24.59,9.14 16.46,9.14 13.61,11.99 11.48,11.99 B10ALT.P$1A
  Bottom 0.203: v45.72,11.38 45.72,10.16 45.82,10.06 IC1.7 | B10.P$1A 3.15,20.32 4.67,18.8 4.67,13.82 6.4,12.09 11.38,12.09 B10ALT.P$1A
I2C_SCL  (via drill 0.41)
  Top 0.203: v55.27,49.17 55.58,48.87 66.85,48.87 v66.95,48.97 | JP3.2 69.8,57.4 v67.87,55.47 v64.21,55.47 | SERIAL.4 59.54,4.37 58.32,5.59 50.09,5.59 v49.17,6.5 49.17,6.4 48.56,5.79 45.21,5.79 44.91,6.1 33.02,6.1 32.51,5.59 v31.5,5.59 | v5.28,50.39 5.28,51.82 18.49,51.82 21.13,54.46 23.98,54.46 26.52,51.92 v32.31,51.92 32.82,52.43 48.77,52.43 49.28,51.92 55.27,51.92 56.69,53.34 60.96,53.34 v62.79,55.17 | v31.5,8.43 v28.96,8.43
  Bottom 0.203: v55.27,49.17 55.07,48.97 55.07,47.95 IC2.26 | v66.95,48.97 67.87,49.89 v67.87,55.47 | v49.17,6.5 49.17,9.96 IC1.12 | v5.28,50.39 5.79,49.89 5.79,49.28 5.89,49.17 IC3.26 | v32.31,51.92 32,51.61 32,41.45 31.39,40.84 31.39,27.84 33.83,25.4 33.83,10.67 31.55,8.38 | 31.55,8.38 31.5,8.33 v31.5,5.59 R1.1 | v28.96,8.43 28.96,8.33 27.84,8.33 S3->A2.1 | v31.5,8.43 31.55,8.38 | v64.21,55.47 62.79,55.47 v62.79,55.17
I2C_SDA  (via drill 0.41)
  Top 0.203: v29.46,4.98 29.57,4.88 v32.31,4.88 | v34.24,7.82 35.56,9.14 45.41,9.14 47.65,11.38 v49.28,11.38 49.48,11.58 65.02,11.58 68.38,14.94 68.38,24.18 v66.95,24.18 | v64.31,47.35 62.79,45.82 56.49,45.82 v56.29,45.62 56.29,45.72 53.65,45.72 52.63,46.74 18.19,46.74 17.88,46.43 7.11,46.43 v5.49,48.06 | v64.62,50.49 68.99,54.86 JP3.1
  Bottom 0.203: v29.46,4.98 29.46,3.96 29.36,3.86 R2.1 | v32.31,4.88 33.73,6.3 33.73,7.72 33.68,7.77 | 33.68,7.77 33.43,8.03 32.72,8.03 S3->A3.1 | SERIAL.3 59.54,6.81 59.54,5.59 52.63,5.59 49.89,8.33 49.89,9.86 49.78,9.96 IC1.13 49.68,10.06 49.68,10.97 v49.28,11.38 | v34.24,7.82 33.73,7.82 33.68,7.77 | v56.29,45.62 54.56,47.35 54.56,47.85 IC2.27 | v64.62,50.49 64.62,47.65 v64.31,47.35 64.31,43.38 64.21,43.28 64.21,39.73 66.75,37.19 66.75,33.83 66.24,33.33 66.24,24.89 v66.95,24.18 | v5.49,48.06 5.49,48.97 5.38,49.07 IC3.27
L0  (via drill 0.41)
  Top 0.203: v25.3,37.59 26.11,36.78 27.64,36.78 28.55,35.87 B1.G(-) 28.65,35.76 29.06,35.36 30.99,35.36 32.31,34.04 B1ALT.G(-)
  Bottom 0.203: v25.3,37.59 25.3,39.62 25.4,39.73 R20.1
L0B
  Top 0.203: B1ALT.B(-) 28.65,32.51 31.39,29.77 31.39,28.45 32.82,28.45 33.43,29.06 33.43,37.29 32.41,37.29 B1.B(-)
  Bottom 0.203: R34.1 34.24,38.91 32.72,37.39 32.41,37.39 B1.B(-)
L1  (via drill 0.41)
  Top 0.203: v26.82,38.61 28.04,37.39 28.55,37.39 B1.R(-) 28.65,37.29 30.38,37.29 v30.58,37.08 | v30.68,34.14 32.31,32.51 B1ALT.R(-)
  Bottom 0.203: v26.82,38.61 26.82,39.62 26.72,39.73 R19.1 | v30.68,34.14 30.79,34.24 30.79,36.88 v30.58,37.08
L1B  (via drill 0.41)
  Top 0.203: v42.57,37.29 42.57,40.54 43.38,41.35 44.81,41.35 44.81,40.13 47.55,37.39 B2.B(-)
  Bottom 0.203: 43.79,32.51 43.79,32 42.06,32 41.66,32.41 41.35,32.41 R33.1 | v42.57,37.29 42.77,37.08 42.77,33.53 43.79,32.51 | 43.79,32.51 B2ALT.B(-)
L2  (via drill 0.41)
  Top 0.203: v41.05,37.8 42.98,35.87 43.79,35.87 B2.G(-) 43.89,35.76 45.82,35.76 47.55,34.04 B2ALT.G(-)
  Bottom 0.203: v41.05,37.8 41.05,39.32 40.64,39.73 R18.1
L2B  (via drill 0.41)
  Top 0.203: v63.91,30.18 63.91,28.65 63.5,28.65 63.3,28.45 62.48,28.45 60.05,30.89 60.05,32.51 B3ALT.B(-)
  Bottom 0.203: B3ALT.B(-) 58.73,32.51 57.2,30.99 R32.1 | v63.91,30.18 63.91,36.27 62.89,37.29 B3.B(-)
L3  (via drill 0.41)
  Top 0.203: v45.01,35.05 47.55,32.51 B2ALT.R(-)
  Bottom 0.203: R17.1 41.96,39.73 42.77,38.91 42.77,38.41 43.79,37.39 B2.R(-) 43.89,37.29 44.81,36.37 44.81,35.26 v45.01,35.05
L3B
  Bottom 0.203: R31.1 25.4,15.75 27.53,15.75 27.53,16.26 28.55,17.27 B4.B(-)
L4  (via drill 0.41)
  Top 0.203: v60.25,33.43 62.18,33.43 62.79,34.04 B3ALT.G(-)
  Bottom 0.203: R16.1 55.88,39.73 56.29,39.32 56.29,38.61 59.03,35.87 B3.G(-) 59.13,35.76 60.05,34.85 60.05,33.63 v60.25,33.43
L4B
  Bottom 0.203: R30.1 40.64,17.27 39.83,16.46 39.83,14.94 40.03,14.73 42.77,14.73 42.77,16.26 43.79,17.27 B5.B(-)
L5
  Top 0.203: B3ALT.R(-) 62.89,32.51 64.62,30.79 64.62,28.25 63.7,28.25 63.5,28.04 59.03,28.04 58.01,29.06 58.01,37.29 59.03,37.29 B3.R(-)
  Bottom 0.203: R15.1 57.2,39.73 58.01,38.91 58.01,38.41 59.03,37.39 B3.R(-)
L5B  (via drill 0.41)
  Top 0.203: v56.59,17.78 57.1,17.27 B6.B(-)
  Bottom 0.203: v56.59,17.78 R29.1
L6
  Bottom 0.203: R14.1 30.48,20.73 32.31,18.9 32.31,18.8 B4.G(-)
L6B  (via drill 0.41)
  Top 0.203: B7ALT.B(-) 84.53,33.63 83.01,33.63 80.06,30.68 76.3,30.68 75.49,29.87 B7ALT2.B(-) 75.39,29.87 74.27,30.99 72.95,30.99 72.95,34.44 72.64,34.75 v72.64,35.15
  Bottom 0.203: B7ALT1.B(-) 74.27,38.81 74.27,37.29 72.44,37.29 R28.1 72.44,37.19 72.64,36.98 v72.64,35.15 | B7.B(-) 85.65,37.29 84.63,36.27 84.63,33.73 B7ALT.B(-)
L7
  Bottom 0.203: R13.1 29.26,20.73 29.67,20.32 29.67,19.91 32.31,17.27 B4.R(-)
L7B  (via drill 0.41)
  Top 0.203: v75.89,9.14 79.15,9.14 81.18,11.18 89.61,11.18 89.61,13.21 88.9,13.92 87.58,13.92 85.75,15.75 B8.B(-)
  Bottom 0.203: B8ALT.B(-) 75.39,14.53 75.39,12.7 74.98,12.29 R27.1 74.98,12.19 75.79,11.38 75.79,9.25 v75.89,9.14
L8
  Bottom 0.203: R12.1 45.72,20.73 47.55,18.9 47.55,18.8 B5.G(-)
L8G
  Top 0.203: B10.G(-) 9.55,18.8 9.86,18.49 12.9,18.49 B10ALT.G(-)
  Bottom 0.203: R26.1 11.89,20.32 12.9,19.3 12.9,18.49 B10ALT.G(-)
L9  (via drill 0.41)
  Top 0.203: v44.91,18.09 45.72,17.27 B5.R(-)
  Bottom 0.203: v44.91,18.09 44.91,20.32 44.5,20.73 R11.1
L9R
  Top 0.203: B10.R(-) 9.55,17.27 9.65,17.37 13.41,17.37 14.43,18.39 B10ALT.R(-)
  Bottom 0.203: R25.1 11.89,16.56 12.7,17.37 14.22,17.37 14.22,18.19 14.43,18.39 B10ALT.R(-)
L10
  Bottom 0.203: R10.1 60.96,20.73 62.79,18.9 62.79,18.8 B6.G(-)
L10B
  Bottom 0.203: B10.B(-) 6.81,17.27 | 6.81,17.27 7.62,17.27 R24.1 | 6.81,17.27 6.81,13.21 13.11,13.21 14.43,14.53 B10ALT.B(-)
L11
  Bottom 0.203: R9.1 59.74,20.73 60.15,20.32 60.15,19.91 62.79,17.27 B6.R(-)
L11G  (via drill 0.41)
  Top 0.203: B9ALT1.G(-) 17.48,36.27 14.43,39.32 10.57,39.32 9.55,40.34 B9.G(-) 9.45,40.34 v7.01,37.9 | v15.75,27.13 15.04,26.42 11.99,26.42 11.79,26.21 9.55,26.21 7.72,28.04 5.38,28.04 v4.57,28.85
  Bottom 0.203: v15.75,27.13 15.75,28.04 17.48,29.77 B9ALT2.G(-) | v4.57,28.85 4.37,29.06 4.37,30.58 5.49,31.7 R23.1 5.49,31.8 5.38,31.9 5.38,33.63 B9ALT.G(-) 5.38,33.73 6.71,35.05 6.71,37.59 v7.01,37.9
L12
  Top 0.203: B7ALT2.G(-) 73.97,33.73 75.59,35.36 79.45,35.36 79.55,35.26 81.38,35.26 81.89,35.76 B7.G(-)
  Bottom 0.203: 80.01,40.49 79.96,40.44 78.13,40.44 B7ALT1.G(-) | 80.01,40.49 83.11,43.59 85.04,43.59 R8.1 | B7ALT.G(-) 86.06,29.77 85.14,28.85 83.62,28.85 83.62,32.61 81.99,34.24 81.99,35.76 B7.G(-) 81.89,35.87 80.87,36.88 80.87,39.62 80.01,40.49
L12R  (via drill 0.41)
  Top 0.203: v7.82,37.19 9.45,38.81 B9.R(-) 9.55,38.91 11.68,38.91 13.51,37.08 15.14,37.08 15.95,36.27 B9ALT1.R(-) | v9.65,29.36 15.54,29.36 15.95,29.77 B9ALT2.R(-)
  Bottom 0.203: R22.1 13.92,35.97 14.53,35.97 14.73,36.17 15.95,36.17 B9ALT1.R(-) | 7.67,34.49 7.82,34.65 v7.82,37.19 | 7.67,34.49 6.91,33.73 B9ALT.R(-) | v9.65,29.36 9.96,29.67 9.96,32.11 7.72,34.34 7.72,34.44 7.67,34.49
L13  (via drill 0.41)
  Top 0.203: v75.89,36.98 77.72,38.81 78.03,38.81 B7ALT1.R(-) 78.13,38.81 79.55,37.39 81.89,37.39 B7.R(-)
  Bottom 0.203: v75.89,36.98 75.89,34.14 75.49,33.73 B7ALT2.R(-) | 82.86,38.25 81.99,37.39 B7.R(-) | 82.86,38.25 82.91,38.3 82.91,39.01 85.95,42.06 85.95,43.18 86.36,43.59 R7.1 | B7ALT.R(-) 84.53,29.87 84.02,30.38 84.02,32.82 82.91,33.93 82.91,38.2 82.86,38.25
L13B  (via drill 0.41)
  Top 0.203: 12.7,33.63 12.7,33.12 11.68,32.11 11.38,32.11 9.25,29.97 7.01,29.97 6.91,29.87 B9ALT.B(-) | 12.7,33.63 15.95,33.63 B9ALT2.B(-) | 12.7,33.63 v12.7,33.73
  Bottom 0.203: 16.2,38.76 16.05,38.91 16.05,39.93 B9ALT1.B(-) | 16.2,38.76 16.87,38.1 R21.1 | B9.B(-) 5.79,38.81 8.53,38.81 8.53,34.14 10.36,32.31 10.36,29.06 9.96,28.65 6.91,28.65 6.91,29.77 B9ALT.B(-) | 16.2,38.76 14.22,36.78 12.8,36.78 12.8,33.83 v12.7,33.73
L14
  Top 0.203: B8.G(-) 78.13,14.22 73.97,18.39 B8ALT.G(-)
  Bottom 0.203: R6.1 86.36,20.73 85.95,20.32 85.95,20.12 85.65,19.81 84.73,19.81 84.73,16.97 81.99,14.22 B8.G(-)
L15
  Top 0.203: B8.R(-) 78.13,15.75 75.49,18.39 B8ALT.R(-)
  Bottom 0.203: R5.1 85.04,20.73 82.91,18.59 82.91,16.66 81.99,15.75 B8.R(-)
MOSI
  Bottom 0.203: MOSI->D6.1 72.95,5.49 73.86,5.49 73.86,4.17 72.24,2.54 64.72,2.54 64.72,4.27 SERIAL.8
N$1  (via drill 0.41)
  Top 0.203: v68.38,29.97 65.23,26.82 v64.11,26.82
  Bottom 0.203: v68.38,29.97 68.38,40.74 66.24,42.88 66.24,56.19 48.87,56.19 48.26,56.79 48.26,60.96 44.3,64.92 JP2.2 | v64.11,26.82 64.11,16.15 62.79,14.83 62.79,14.22 JP1.2
N$2  (via drill 0.41)
  Top 0.203: v16.66,45.11 23.37,45.11 23.77,45.52 31.09,45.52 33.73,42.88 33.73,37.59 34.14,37.19 v34.14,35.56 | v34.24,8.84 33.53,8.13 33.53,7.11 35.56,7.11 v35.66,7.21 | v37.29,1.93 37.59,2.23 v72.95,2.23
  Bottom 0.203: v16.66,45.11 16.66,47.35 12.5,51.51 12.5,54.97 IC3.13 | v34.14,35.56 33.73,35.15 33.73,26.11 34.24,25.6 v34.24,8.84 | v35.66,7.21 37.29,5.59 v37.29,1.93 | v72.95,2.23 74.27,3.56 74.27,9.96 74.88,10.57 R27.2
N$3  (via drill 0.41)
  Top 0.203: v12.19,23.67 12.19,19.41 15.85,19.41 21.03,14.22 v26.21,14.22 | v28.65,5.59 28.65,2.64 72.24,2.64 v78.03,8.43 | v77.01,39.52 75.18,41.35 v73.46,41.35
  Bottom 0.203: v12.19,23.67 12.39,23.88 12.39,33.02 11.99,33.43 11.99,34.04 12.39,34.44 12.39,38 15.04,40.64 15.04,48.36 11.99,51.41 11.99,54.86 11.89,54.97 IC3.12 | v26.21,14.22 29.67,10.77 29.67,6.6 v28.65,5.59 | v78.03,8.43 78.54,8.94 78.54,36.98 77.01,38.51 v77.01,39.52 | v73.46,41.35 72.44,40.34 72.44,39.01 R28.2
N$4  (via drill 0.41)
  Top 0.203: v61.47,54.86 59.84,56.49 43.38,56.49 43.08,56.79 42.47,56.79 41.86,56.19 27.94,56.19 27.33,56.79 9.65,56.79 2.85,49.99 v2.85,43.38 | v2.54,27.13 5.28,24.38 v27.94,24.38
  Bottom 0.203: v61.47,54.86 61.47,53.85 61.57,53.75 IC2.13 | v2.85,43.38 1.83,42.37 1.83,39.01 2.34,38.51 2.34,35.26 1.83,34.75 1.83,32.61 2.54,31.9 v2.54,27.13 | v27.94,24.38 29.16,23.16 29.16,22.45 R13.2
N$5  (via drill 0.41)
  Top 0.203: v48.46,51.71 48.06,51.31 v37.9,51.31 | v35.76,26.92 35.76,25.09 v33.12,25.09
  Bottom 0.203: v48.46,51.71 48.46,55.58 59.54,55.58 60.86,54.25 60.86,53.85 60.96,53.75 IC2.12 | v37.9,51.31 35.76,49.17 35.76,42.88 36.27,42.37 36.27,39.01 35.76,38.51 35.76,35.26 36.27,34.75 36.27,32.61 35.76,32.11 v35.76,26.92 | v33.12,25.09 30.48,22.45 R14.2
N$6  (via drill 0.41)
  Top 0.203: v12.7,59.03 13.01,58.73 31.39,58.73 35.66,62.99 v43.69,62.99 | v49.48,23.16 53.03,19.61 v53.34,19.61
  Bottom 0.203: v12.7,59.03 12.7,57.1 11.28,55.68 11.28,55.17 11.18,55.07 IC3.11 | v43.69,62.99 47.75,58.93 47.75,47.45 48.97,46.23 48.97,30.89 49.48,30.38 v49.48,23.16 | v53.34,19.61 53.75,19.2 53.75,17.78 R29.2
N$7  (via drill 0.41)
  Top 0.203: v62.89,42.98 58.83,42.98 v58.73,43.08
  Bottom 0.203: v62.89,42.98 62.89,48.36 60.76,50.49 60.76,52.73 60.45,53.03 60.45,53.54 60.35,53.65 IC2.11 | v58.73,43.08 57.2,41.55 R15.2
N$9  (via drill 0.41)
  Top 0.203: v59.84,52.63 60.86,51.61 v61.47,51.61 | v63.6,45.52 63.5,45.41 59.54,45.41 v57.2,43.08
  Bottom 0.203: v59.84,52.63 59.84,53.54 59.74,53.65 IC2.10 | v61.47,51.61 63.6,49.48 v63.6,45.52 | v57.2,43.08 55.88,41.76 R16.2
N$10  (via drill 0.41)
  Top 0.203: v58.83,52.63 57.61,51.41 49.17,51.41 48.36,50.6 v44.7,50.6
  Bottom 0.203: v58.83,52.63 58.83,53.54 58.93,53.65 IC2.9 | v44.7,50.6 42.57,48.46 42.57,43.69 41.96,43.08 41.96,41.55 R17.2
N$11  (via drill 0.41)
  Top 0.203: v54.36,49.17 54.05,49.48 51.82,49.48 51.41,49.89 v45.31,49.89 | v42.98,43.08 42.67,42.77 v41.25,42.77
  Bottom 0.203: v54.36,49.17 54.36,49.28 58.22,53.14 58.22,53.54 58.32,53.65 IC2.8 | v45.31,49.89 42.98,47.55 v42.98,43.08 | v41.25,42.77 40.64,42.16 R18.2
N$12  (via drill 0.41)
  Top 0.203: v57.61,54.86 57.1,55.37 v26.72,55.37
  Bottom 0.203: v57.61,54.86 57.61,53.85 57.71,53.75 IC2.7 | v26.72,55.37 26.72,41.55 R19.2
N$13  (via drill 0.41)
  Top 0.203: v10.67,56.08 27.43,56.08 27.74,55.78 42.47,55.78 v42.77,56.08
  Bottom 0.203: v10.67,56.08 10.67,55.17 10.57,55.07 IC3.10 | v42.77,56.08 46.02,52.83 46.02,25.81 42.47,22.25 42.47,17.58 40.64,15.75 R30.2
N$14  (via drill 0.41)
  Top 0.203: v9.96,53.85 11.18,52.63 v18.29,52.63 | v24.28,39.42 23.98,39.12 23.67,39.12 23.06,38.51 23.06,33.73 25.2,33.73 26.82,32.11 26.82,30.99 24.99,30.99 v24.49,30.48
  Bottom 0.203: v9.96,53.85 9.96,54.97 IC3.9 | v18.29,52.63 19.2,51.71 19.2,49.78 23.47,45.52 25.2,45.52 25.2,42.77 24.28,41.86 v24.28,39.42 | v24.49,30.48 24.28,30.28 24.28,26.72 25.2,25.81 25.2,21.34 24.69,20.83 24.69,18.09 25.4,17.37 R31.2
N$15  (via drill 0.41)
  Top 0.203: v41.86,44.6 42.67,43.79 50.8,43.79 v53.85,40.74
  Bottom 0.203: v41.86,44.6 40.84,45.62 40.84,57.2 42.98,59.33 42.98,70 13.61,70 9.25,65.63 9.25,55.07 IC3.8 | v53.85,40.74 53.54,40.44 53.54,36.17 57.1,32.61 R32.2
N$16  (via drill 0.41)
  Top 0.203: v8.53,56.69 9.14,57.3 37.59,57.3 38.2,56.69 41.35,56.69 v41.55,56.9 | v51,46.02 v41.86,46.02 | v52.43,39.32 53.14,38.61 53.14,28.45 42.88,28.45 v41.76,29.57
  Bottom 0.203: v8.53,56.69 8.53,55.07 IC3.7 | v41.55,56.9 41.86,56.59 v41.86,46.02 | v51,46.02 51,42.88 52.43,41.45 v52.43,39.32 | v41.76,29.57 41.35,29.97 41.35,30.68 R33.2
N$17  (via drill 0.41)
  Top 0.203: v7.82,57.3 8.84,58.32 v32,58.32
  Bottom 0.203: v7.82,57.3 7.82,55.07 IC3.6 | v32,58.32 33.73,56.59 33.73,41.05 35.15,39.62 35.15,38.1 34.34,37.29 R34.2
N$18  (via drill 0.41)
  Top 0.203: v13.92,48.36 14.12,48.56 20.42,48.56 21.44,47.55 37.59,47.55 v37.9,47.85 | v37.9,21.84 15.14,21.84 v14.53,21.23
  Bottom 0.203: v13.92,48.36 13.21,49.07 IC3.15 | v37.9,21.84 v37.9,47.85 | v14.53,21.23 13.61,20.32 R26.2
N$19  (via drill 0.41)
  Top 0.203: v49.28,54.66 48.97,54.97 27.53,54.97 v26.01,53.44
  Bottom 0.203: v49.28,54.66 56.59,54.66 57,54.25 57,53.75 IC2.6 | v26.01,53.44 25.91,53.34 25.91,42.27 25.4,41.76 R20.2
N$20  (via drill 0.41)
  Top 0.203: v62.18,42.27 62.08,42.37 56.59,42.37 54.25,40.03 52.12,40.03 48.77,36.68 v48.77,30.07
  Bottom 0.203: v62.18,42.27 62.18,47.85 IC2.15 | v48.77,30.07 48.67,29.97 48.67,25.4 45.72,22.45 R12.2
N$21  (via drill 0.41)
  Top 0.203: v61.67,25.4 60.76,24.49 55.07,24.49 54.46,23.88 v45.62,23.88
  Bottom 0.203: v61.67,25.4 61.47,25.6 61.47,47.75 61.57,47.85 IC2.16 | v45.62,23.88 44.5,22.76 44.5,22.45 R11.2
N$22
  Bottom 0.203: R10.2 60.96,47.85 IC2.17
N$23  (via drill 0.41)
  Top 0.203: v58.93,41.66 55.68,38.41 55.68,36.58 55.17,36.07 v55.17,32.92
  Bottom 0.203: v58.93,41.66 60.55,43.28 60.55,45.01 60.45,45.11 60.45,47.75 60.35,47.85 IC2.18 | v55.17,32.92 56.29,31.8 56.29,29.87 59.84,26.31 59.84,22.55 59.74,22.45 R9.2
N$24  (via drill 0.41)
  Top 0.203: v59.84,50.49 60.25,50.9 61.77,50.9 63.5,52.63 63.5,56.49 67.16,56.49 69.39,58.73 v71.63,58.73
  Bottom 0.203: v59.84,50.49 59.84,48.06 59.74,47.95 IC2.19 | v71.63,58.73 85.04,45.31 R8.2
N$25  (via drill 0.41)
  Top 0.203: v59.64,46.74 60.96,48.06 v67.06,48.06
  Bottom 0.203: v59.64,46.74 59.13,47.24 59.13,47.75 59.03,47.85 IC2.20 | v67.06,48.06 68.58,49.58 68.58,57.91 70.1,59.44 84.63,59.44 84.63,47.24 86.36,45.52 R7.2
N$26  (via drill 0.41)
  Top 0.203: v59.84,44.7 60.15,44.4 63.91,44.4 64.31,43.99 64.31,42.57 64.21,42.47 64.21,41.05 64.52,41.05 66.24,39.32 67.56,39.32 68.58,38.3 68.58,33.22 v70.71,33.22 | v71.42,25.81 73.36,23.88 v85.34,23.88
  Bottom 0.203: v59.84,44.7 58.52,46.02 58.52,47.75 58.42,47.85 IC2.21 | v70.71,33.22 71.42,32.51 v71.42,25.81 | v85.34,23.88 86.36,22.86 R6.2
N$27  (via drill 0.41)
  Top 0.203: v63.6,43.69 v59.84,43.69 | v63.4,25.4 65.84,25.4 67.36,26.92 71.32,26.92 73.86,24.38 83.41,24.38 v83.62,24.59
  Bottom 0.203: v59.84,43.69 57.81,45.72 57.81,47.85 IC2.22 | v63.6,43.69 63.6,42.57 61.87,40.84 61.87,26.92 v63.4,25.4 | v83.62,24.59 85.04,23.16 85.04,22.45 R5.2
N$28  (via drill 0.41)
  Top 0.203: v12.39,41.76 11.68,41.05 v10.67,41.05 | v10.67,38.2 11.58,37.29 12.7,37.29 14.63,35.36 v14.94,35.36
  Bottom 0.203: v12.39,41.76 12.39,44.91 12.7,45.21 12.7,48.36 12.6,48.46 12.6,48.97 12.5,49.07 IC3.16 | v10.67,38.2 v10.67,41.05 | v14.94,35.36 15.04,35.26 15.04,21.74 15.44,21.34 15.44,17.98 14.02,16.56 13.61,16.56 R25.2
N$29  (via drill 0.41)
  Top 0.203: v11.99,48.06 12.8,47.24 16.46,47.24 17.07,47.85 v18.29,47.85 | v20.02,31.7 19.2,30.89 15.14,30.89 v14.33,30.07
  Bottom 0.203: v11.99,48.06 11.99,48.97 11.89,49.07 IC3.17 | v18.29,47.85 20.02,46.13 v20.02,31.7 | v14.33,30.07 12.9,28.65 12.9,23.37 9.35,19.81 8.43,19.81 8.43,16.56 7.62,15.75 R24.2
N$30  (via drill 0.41)
  Top 0.203: v10.97,43.89 8.43,41.35 4.78,41.35 2.34,38.91 2.34,35.26 1.83,34.75 1.83,32.61 3.96,32.61 5.69,30.89 7.62,30.89 v7.82,30.68
  Bottom 0.203: v10.97,43.89 10.97,48.97 11.07,49.07 IC3.18 | v7.82,30.68 7.21,31.29 7.21,31.7 R23.2
N$31  (via drill 0.41)
  Top 0.203: v10.67,50.29 11.58,49.38 v18.29,49.38 | v22.86,32.41 22.45,32 20.73,32 20.12,32.61 14.53,32.61 14.22,32.92 v13.41,32.92
  Bottom 0.203: v10.67,50.29 10.67,49.28 10.57,49.17 IC3.19 | v18.29,49.38 22.86,44.81 v22.86,32.41 | v13.41,32.92 13.82,33.33 13.82,34.14 R22.2
N$32  (via drill 0.41)
  Top 0.203: v9.96,45.72 10.06,45.82 v18.29,45.82
  Bottom 0.203: v9.96,45.72 9.96,49.07 IC3.20 | v18.29,45.82 18.09,45.62 18.09,40.84 18.59,40.34 18.59,38.1 R21.2
N$33  (via drill 0.41)
  Top 0.203: v47.04,57.2 48.06,57.2 48.06,66.04 47.85,66.24 40.44,66.24 39.22,65.02 JP2.4 | v50.19,39.22 v47.75,41.66 | v51,18.09 52.83,16.26 58.83,16.26 59.23,15.85 59.23,15.04 59.03,15.04 58.22,14.22 JP1.4
  Bottom 0.203: v47.04,57.2 47.35,56.9 47.35,42.06 v47.75,41.66 | v50.19,39.22 51,38.41 51,35.26 51.51,34.75 51.51,32.61 51,32.11 v51,18.09
N$34  (via drill 0.41)
  Top 0.203: v57.71,25.2 56.49,26.42 49.48,26.42 49.07,26.01 v41.35,26.01 | v39.22,30.48 38.3,31.39 38.3,41.15 v39.01,41.15
  Bottom 0.203: v57.71,25.2 57.71,16.76 55.17,14.22 JP1.5 | v41.35,26.01 39.22,28.14 v39.22,30.48 | v39.01,41.15 39.83,41.96 39.83,43.48 40.44,44.09 40.44,65.43 39.62,66.24 36.68,66.24 36.68,65.02 JP2.5
N$45  (via drill 0.41)
  Top 0.203: v53.14,45.21 52.83,45.52 51.51,45.52 51.31,45.31 40.44,45.31 v39.73,46.02
  Bottom 0.203: v53.14,45.21 53.14,22.45 52.63,21.95 52.63,14.22 JP1.6 | v39.73,46.02 39.01,46.74 39.01,53.65 39.32,53.95 39.32,59.74 34.14,64.92 JP2.6
RESET  (via drill 0.41)
  Top 0.203: S4.B2 8.64,64.52 10.57,62.59 22.25,62.59 25.7,59.13 29.87,59.13 31.19,60.45 S1.3 31.29,60.45 31.29,62.99 S2.3 | v31.29,43.38 21.64,43.38 U1.RES
  Bottom 0.203: v31.29,43.38 31.6,43.69 31.6,57.71 31.29,58.01 31.29,60.45 S1.3
SCLK  (via drill 0.41)
  Top 0.203: v74.98,6.4 74.57,6.81 64.72,6.81 SERIAL.7
  Bottom 0.203: v74.98,6.4 74.98,5.99 75.39,5.59 SCLK->D5.2
SLIDER_IN  (via drill 0.41)
  Top 0.203: v58.52,15.54 50.39,15.54 48.06,13.21 43.38,13.21 42.47,14.12 42.47,24.38 28.96,24.38 27.64,25.7 25.3,25.7 24.59,26.42 22.35,26.42 U1.A0
  Bottom 0.203: v58.52,15.54 58.93,15.14 58.93,10.06 62.08,6.91 SERIAL.5

## Text on the board
_tsilk: RESET | RESET | PROGRAMMING HEADER | 1
_bsilk: 5V | PROGRAMMING HEADER | GND/BLACK | RESET BUTTON | SCL | SDA | SLIDER | GND | SDA | SCLK | 1 | A5-SCL | A4-SDA | GITHUB: SKAARHOJ-Open-Engineering | BI8-SE-C30RGB | I2C PULL-UP | v07-13 | 5V | SCL | SKAARHOJ 2013 | DISP | MOSI